# Altium PCB 6F.PcbDoc
Units mm, origin at the board's own origin, x right, y up, seen from the top; angles counter-clockwise.
Board outline 175 x 100 mm, 2 copper layers (Top Layer, Bottom Layer); 66 components, 52 nets, 216 pads, 0 vias.
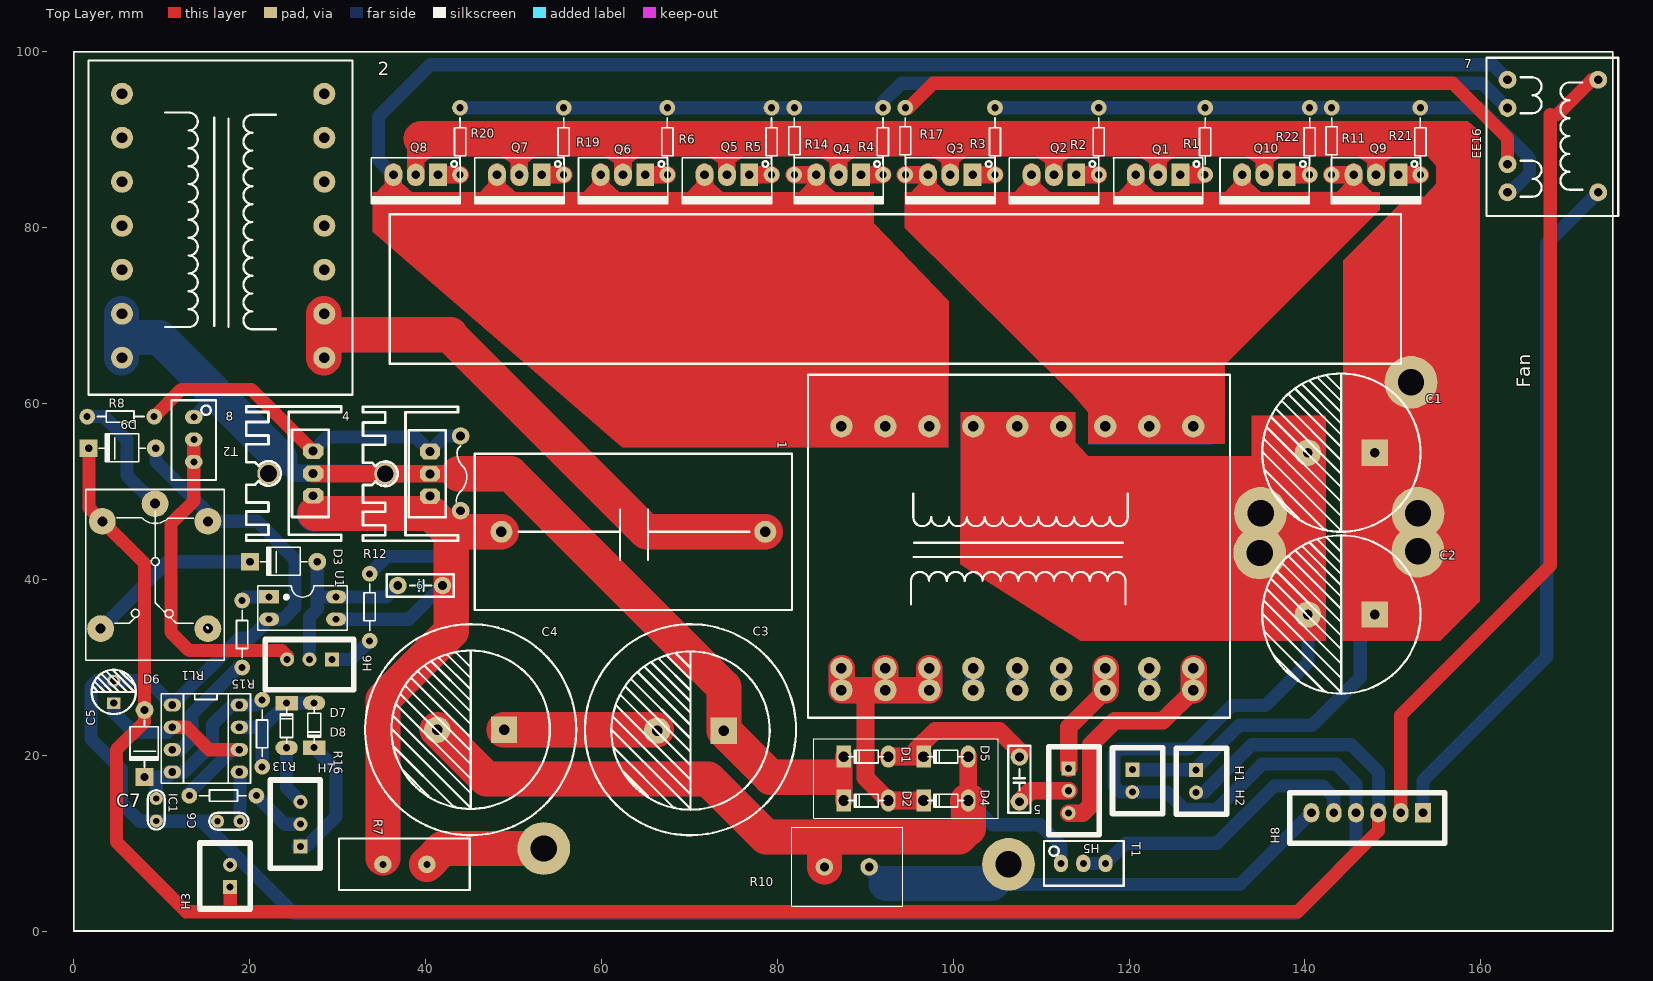
[diagram p0: Top Layer view]
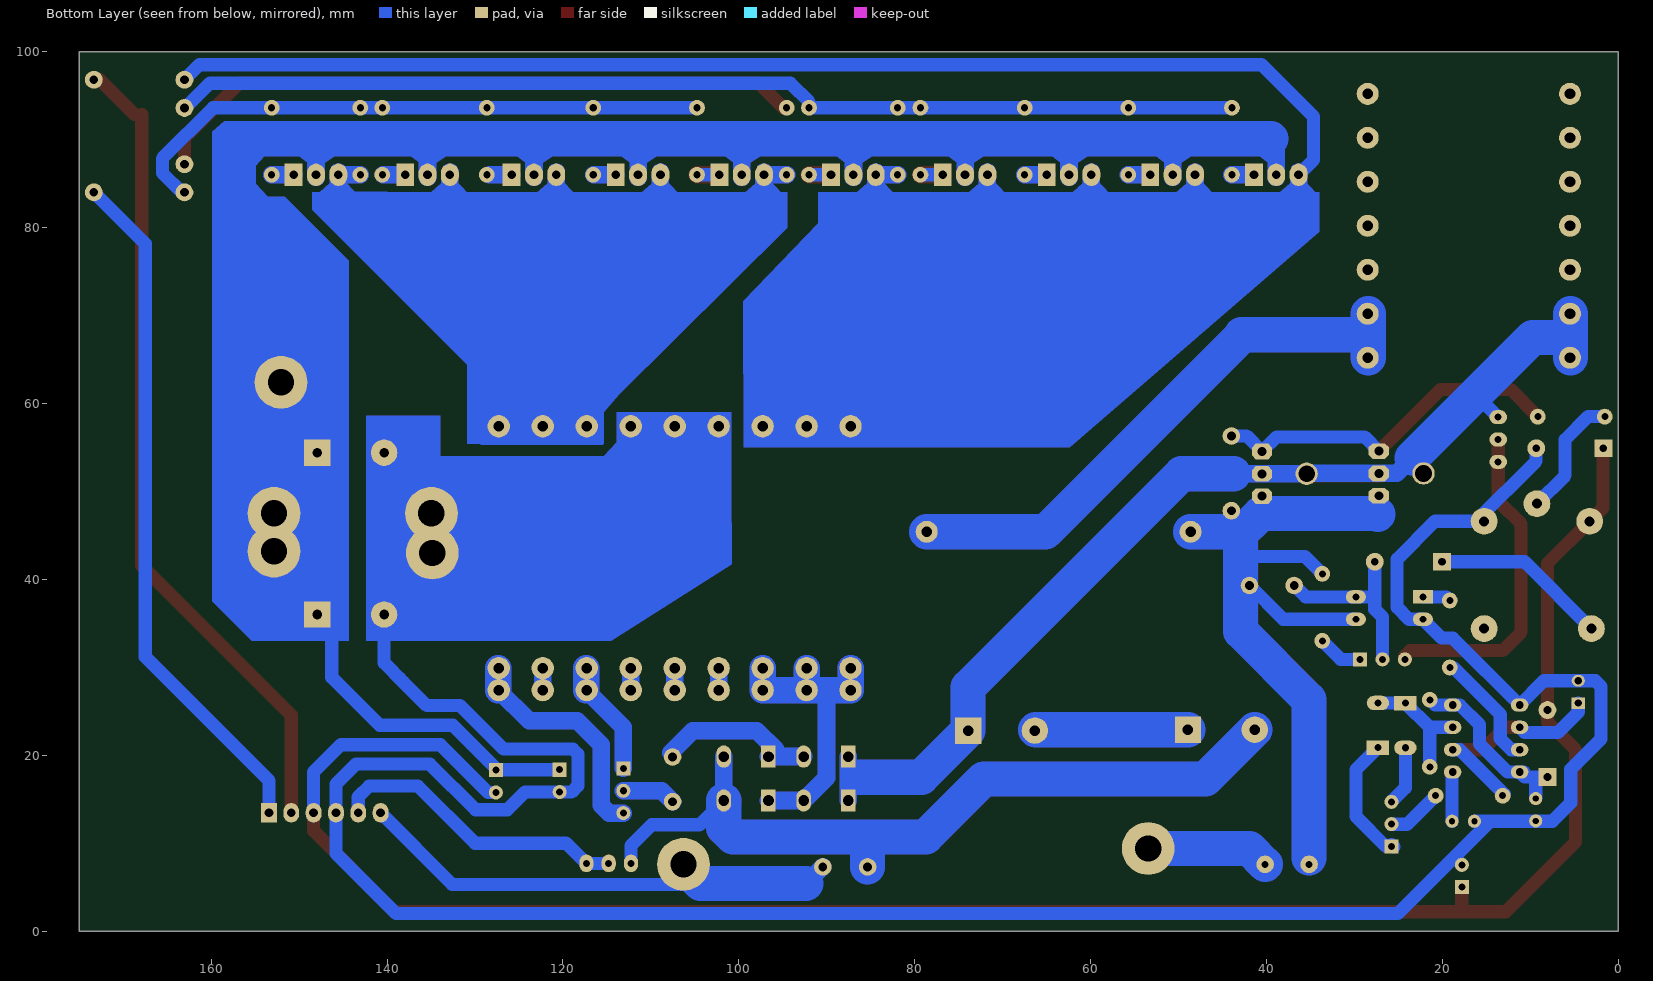
[diagram p1: Bottom Layer view, seen from below]
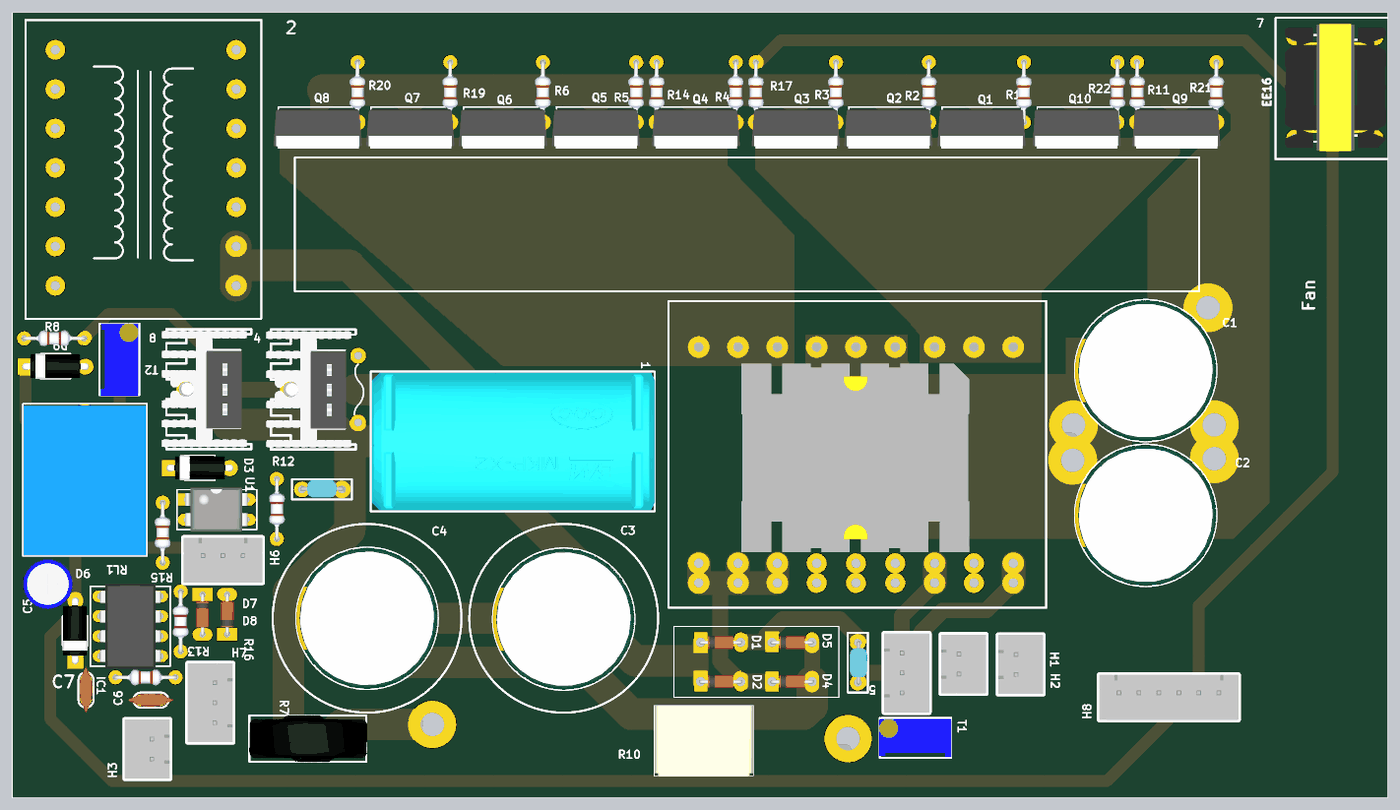
[diagram p2: 3D render of the assembled board from above, using the file's embedded part models]

## Layer stack, top to bottom
Top Layer: signal copper 0.0356
Dielectric: dielectric 0.32, FR-4, Dk 4.8
Bottom Layer: signal copper 0.0356

## Board outline
0,0 175,0 175,100 0,100 0,0

## Design rules (kind name [scope] priority, off if disabled: settings)
Clearance [All] p1: gap=0
ComponentClearance [All] p1: gap=0 collisioncheckmode=3 verticalgap=0.254 showdistances=FALSE
Height [All] p1: minheight=0 maxheight=50.8 prefheight=12.7
MatchedLengths E16 [All] p1: tolerance=0 checknetsindiffpair=TRUE checkdiffpairvsdiffpair=TRUE checkothers=TRUE
MinimumSolderMaskSliver [All] p1: minsoldermaskwidth=0.1
PolygonConnect [All] p1: connectstyle=Relief reliefconductorwidth=0.254 reliefentries=4 polygonreliefangle="90 Angle"
RoomDefinition 8F [InComponentClass('8F')] p1: confinementstyle=ConfineIn formatcopy=TRUE lockcomponents=FALSE outline -345.84,-25.64 -295.04,-25.64 -295.04,-0.24 -345.84,-0.24
RoutingVias [All] p1: holewidth=0.711 width=1.27 viastyle="Through Hole" minholewidth=0.711 minwidth=1.27 maxholewidth=0.711 maxwidth=1.27
SilkToSilkClearance [(IsText)] p1: silktosilkclearance=0
SilkscreenOverComponentPads [All] p1: minsilkscreentomaskgap=0
SolderMaskExpansion [All] p1: expansion=0.102
Width [All] p1: maxlimit=10 minlimit=0.254 preferedwidth=1
23 further rules are at their usual default settings.

## Classes and differential pairs
net class E16: E16_1 E16_2

## Components (designator, comment, footprint, x,y, rotation, side; value= is the part's Value field where it differs from the comment)
1 "Cap_5UF250V" Cap_5UF250V 78.64,45.4 r0 top
2 "L2" EE35 31.7,61 r90 top
4 "TYN_1225" QTO-220H3 40.52,49.46 r90 top
5 "Cap_684J250V" Cap_104J400V 107.54,19.8 r270 top
6 "Cap_104J400V" Cap_104J400V 36.86,39.3 r0 top
7 "EE16" EE16 163.04,84 r90 top
8 "TYN_1225" QTO-220H3 27.24,49.5 r90 top
C1 "4700uF" "tu hoa 18mm" 144.14,54.4 r0 top
C2 "4700uF" "tu hoa 18mm" 144.14,36 r0 top
C3 "100uF" "tu Hoa 18mm" 70.14,22.8 r0 top
C4 "100uF" "tu Hoa 18mm" 45.14,22.9 r0 top
C5 "1uF" "tu hoa 5mm" 4.56,27.2 r90 top
C6 "104" "tu gom" 17.64,12.5 r180 top
C7 "104" "tu gom" 9.4,13.8 r90 top
D1 "Diode" "DIODE 0.5A"#1 90.094,19.851 r0 top
D2 "Diode" "DIODE 0.5A"#1 90.094,14.851 r0 top
D3 "100v" "DIODE 1A" 28.96,42 r0 top
D4 "Diode" "DIODE 0.5A"#1 99.174,14.851 r0 top
D5 "Diode" "DIODE 0.5A"#1 99.174,19.851 r0 top
D6 "100v" "DIODE 1A" 8.06,26.4 r90 top
D7 "100v" "DIODE 0.5A"#2 27.34,23.4 r90 top
D8 "100v" "DIODE 0.5A"#2 24.219,23.387 r270 top
D9 "100v" "DIODE 1A" 10.6,54.9 r0 top
H1 "Fan" XH2.54M-2 120.38,18.351 r270 top
H2 "JackCoBop" XH2.54M-2 127.64,18.3 r270 top
H3 "CachLy" XH2.54M-2 17.8,5 r90 top
H5 "Switch" XH2.54M-3 113.14,18.5 r270 top
H6 "TanSo" XH2.54M-3 29.36,30.9 r180 top
H7 "TanSo" XH2.54M-3 25.8,9.62 r90 top
H8 "Header 6P 2.54 Duc Thang" XH2.54M-6 153.434,13.451 r180 top
IC1 "LM555 DIP" DIP8 15.04,21.9 r270 top
Q1 "IRF840" QTO-220 125.84,86 r180 top
Q2 "IRF840" QTO-220 114,86 r180 top
Q3 "IRF840" QTO-220 102.22,86 r180 top
Q4 "IRF840" QTO-220 89.52,86 r180 top
Q5 "IRF840" QTO-220 76.82,86 r180 top
Q6 "IRF840" QTO-220 65,86 r180 top
Q7 "IRF840" QTO-220 53.22,86 r180 top
Q8 "IRF840" QTO-220 41.44,86 r180 top
Q9 "IRF840" QTO-220 150.62,86 r180 top
Q10 "IRF840" QTO-220 137.94,86 r180 top
R1 "100" PCBComponent_1 128.66,93.62 r270 top
R2 "100" PCBComponent_1 116.56,93.62 r270 top
R3 "100" PCBComponent_1 104.76,93.62 r270 top
R4 "100" PCBComponent_1 92.02,93.62 r270 top
R5 "100" PCBComponent_1 79.36,93.62 r270 top
R6 "100" PCBComponent_1 67.5,93.62 r270 top
R7 "5D-9" "tro nhiet d-9" 37.66,7.6 r0 top
R8 "100" PCBComponent_1 9.16,58.5 r180 top
R10 "0.47R" Res_5W 77.56,3.7 r0 top
R11 "2k2" PCBComponent_1 143.04,86 r90 top
R12 "100K" PCBComponent_1 33.66,33 r90 top
R13 "18K/4148" PCBComponent_1 21.44,26.3 r270 top
R14 "2k2" PCBComponent_1 81.94,86 r90 top
R15 "2k2" PCBComponent_1 19.16,37.6 r270 top
R16 "18K/4148" PCBComponent_1 13.16,15.4 r0 top
R17 "0" PCBComponent_1 94.56,86 r90 top
R19 "100" PCBComponent_1 55.72,93.62 r270 top
R20 "100" PCBComponent_1 43.94,93.62 r270 top
R21 "100" PCBComponent_1 153.12,93.62 r270 top
R22 "100" PCBComponent_1 140.54,93.62 r270 top
RL1 "Relay" "Relay 5 Chan SRD" 9.26,48.6 r270 top
T1 "10K" "Bien Tro Vi Chinh Dung" 114.8,7.7 r0 top
T2 "500K" "Bien Tro Vi Chinh Dung" 13.66,55.9 r270 top
U1 "OPTO PC817 DIP4" DIP4 22.16,38 r270 top
? "EE4220" EE4220 87.3,57.4 r0 top

## Footprints (in the part's own frame and the unit in brackets; to place one, negate y for a bottom-side part, rotate by r counter-clockwise, add the part's x,y. Pads: shape width x height; smd on the part's side, far side on the other; paste and mask are expansions set on the pad)
"Bien Tro Vi Chinh Dung" [mm] "Bien tro vi chinh"
  oval 1.6x2 hole 0.8: 1(-2.54,0) 2(0,0) 3(2.54,0)
  silkscreen extent -4.47,-2.54 4.6,2.54, body extent -4.54,-2.4 4.66,2.4, height 12.02
Cap_5UF250V [mm] "C?"
  round 2.5 hole 1.2: 1(0,0) 2(-30,0)
  silkscreen extent -33.02,-8.89 3.05,8.89, body extent -32.89,-8.75 3.11,8.75, height 31.5
Cap_104J400V [mm] "C?"
  round 2 hole 1: 1(0,0) 2(5.08,0)
  silkscreen extent -1.27,-1.27 6.35,1.27, body extent -0.25,-1.02 5.33,1.19, height 6
"DIODE 0.5A"#1 [mm] "Diode muoi, xung"
  oval 1.651x2.54 hole 1.2: 1(2.54,0)
  rect 1.651x2.54 hole 1.2: 2(-2.54,0)
  silkscreen extent -2.03,-0.76 2.03,0.71, body extent -2.76,-0.84 2.76,0.81, height 1.56
"DIODE 0.5A"#2 [mm] "Diode muoi, xung"
  oval 1.651x2.54 hole 0.813: 1(2.54,0)
  rect 1.651x2.54 hole 0.813: 2(-2.54,0)
  silkscreen extent -2.03,-0.76 2.03,0.71, body extent -2.76,-0.84 2.76,0.81, height 1.56
"DIODE 1A" [mil] "Diode 1A"
  round 80 hole 35: 1(-50,0)
  rect 80x80 hole 35: 2(-350,0)
  silkscreen extent -305,-61 -95,65, body extent -366,-61 -34,65, height 122
DIP4 [mil] "W.300/L.400"
  rect 60x90 hole 31: 1(0,2.52)
  oval 60x90 hole 31: 2(100,2.52) 3(100,302.52) 4(0,302.52)
  silkscreen extent -50,-47 150,353, body extent -59,-7 159,307, height 170
DIP8 [mm] "W.300/L.400"
  oval 1.5x2 hole 0.864: 1(-3.81,-3.81) 2(-1.27,-3.81) 3(1.27,-3.81) 4(3.81,-3.81) 5(3.81,3.81) 6(1.27,3.81) 7(-1.27,3.81) 8(-3.81,3.81)
  silkscreen extent -5.08,-5.08 5.08,5.08, body extent -5.4,-3.88 5.4,3.88, height 4.5
EE16 [mil] "L?"
  round 80 hole 39: 1(0,-405.51) 2(503.94,-405.51) G1(0,0) G2(377.95,0) S1(125.98,0) S2(503.94,0)
  silkscreen extent -106,-496 602,94, body extent -67,-461 571,48, height 652
EE35 [mm] "L?"
  round 2.5 hole 1.2: 1(4.2,26.2) 1(9.2,26.2) 3(14.2,26.2) 4(19.2,26.2) 5(24.2,26.2) 6(29.2,26.2) 7(34.2,26.2) 8(4.2,3.2) 8(9.2,3.2) 10(14.2,3.2) 11(19.2,3.2) 12(24.2,3.2) 13(29.2,3.2) 14(34.2,3.2)
  silkscreen extent 0,0 38,30
EE4220 [mm]
  round 2.54 hole 1.2: 0v(0,-27.5) 0v(0,-30) 0v(5,-27.5) 0v(5,-30) 0v(10,-27.5) 0v(10,-30) D1(0,0) D1(5,0) D1(10,0) D2(30,0) D2(35,0) D2(40,0) GND(15,0) GND(20,0) GND(25,0) NC2(15,-27.5) NC2(15,-30) NC3(20,-27.5) NC3(20,-30) NC4(25,-27.5) NC4(25,-30) NC5(35,-27.5) NC5(35,-30) Out1(30,-27.5) Out1(30,-30) Out2(40,-27.5) Out2(40,-30)
  Bottom Layer lines w2: 0,-27.5 0,-30 ; 5,-30 5,-27.5 ; 10,-30 10,-27.5 ; 15,-30 15,-27.5 ; 20,-30 20,-27.5 ; 25,-30 25,-27.5 ; 30,-30 30,-27.5 ; 35,-30 35,-27.5 ; 40,-30 40,-27.5 ; 0,-30 0,-30
  silkscreen extent -3.81,-33.15 44.19,5.85, body extent 5.42,-26.09 34.42,-2.09, height 21.4
PCBComponent_1 [mm]
  round 1.8 hole 0.8: 0(0,0) 1(7.62,0)
  silkscreen extent 1.14,-0.63 6.48,0.64, body extent -0.24,-1.02 7.86,0.98, height 2
QTO-220 [mil] "TO-220 - 1-2-3"
  rect 80x100 hole 39: 1(0,0)
  oval 80x100 hole 39: 2(100,0) 3(200,0)
  silkscreen extent -100,-76 300,130, body extent -119,-64 322,121, height 755
QTO-220H3 [mil] "TO-220 1-2-3"
  oct 70x90 hole 40: 1(0,0) 2(100,0) 3(200,0)
  round 100 hole 75: 2(100,200)
  silkscreen extent -200,-125 400,300, body extent -190,-102 392,323, height 984
"Relay 5 Chan SRD" [mil] "Relay SPDT, 5 pin, 10A,W 650mil, L 800mil, H 800mil"
  round 120 hole 45: 1(0,0) 2(559.06,236.22) 3(559.06,-243.78) 4(78.74,-236.22) 5(78.74,236.22)
  silkscreen extent -63,-311 700,310, body extent -55,-306 697,304, height 602
Res_5W [mm] "R?"
  round 2 hole 1: 1(7.8,3.6) 2(12.9,3.6)
  silkscreen extent 4.1,-0.9 16.7,8.1, body extent 4.15,-0.9 16.65,8.1, height 25
"tro nhiet d-9" [mm]
  round 2 hole 0.8: 1(-2.5,0) 2(2.5,0)
  silkscreen extent -7.49,-2.92 7.37,2.92, body extent -7.5,-3 7.5,3, height 23.5
"tu gom" [mm] "Tu gom mini"
  round 1.5 hole 0.7: 1(-1.27,0) 2(1.27,0)
  silkscreen extent -2.25,-0.97 2.22,0.97, body extent -2.92,-0.85 2.92,0.85, height 6.12
"tu hoa 5mm" [mm]
  rect 1.3x1.5 hole 0.8: 1(-1.27,0)
  oval 1.3x1.5 hole 0.8: 2(1.27,0)
  silkscreen extent -2.51,-2.51 2.51,2.51, body extent -3.12,-3.18 3.23,3.18, height 14.55
"tu hoa 18mm" [mm]
  rect 3x3 hole 1.1: 1(3.8,0)
  round 3 hole 1.1: 2(-3.8,0)
  silkscreen extent -9,-9 9,9, body extent -9.01,-9 9,9, height 3
"tu Hoa 18mm" [mm]
  rect 3x3 hole 1.2: 1(3.8,0)
  round 3 hole 1.2: 2(-3.8,0)
  silkscreen extent -9,-9 9,9, body extent -9.01,-9 9,9, height 3
XH2.54M-2 [mm]
  rect 1.6x1.6 hole 0.8: 1(0,0)
  round 1.6 hole 0.8: 2(2.54,0)
  silkscreen extent -2.48,-2.26 5.02,3.46, body extent -2.48,-2.26 5.02,3.48, height 6.91
XH2.54M-3 [mm]
  rect 1.6x1.6 hole 0.8: 1(0,0)
  round 1.6 hole 0.8: 2(2.54,0) 3(5.08,0)
  silkscreen extent -2.48,-2.26 7.56,3.46, body extent -2.48,-2.26 7.56,3.48, height 6.91
XH2.54M-6 [mm]
  rect 1.8x2.2 hole 1 unplated: 1(0,0)
  oval 1.8x2.2 hole 1 unplated: 2(2.54,0) 3(5.08,0) 4(7.62,0) 5(10.16,0) 6(12.7,0)
  silkscreen extent -2.48,-2.26 15.18,3.46, body extent -2.48,-2.26 15.18,3.48, height 6.91

## Part data
1 5 6: "C?"
2: library part EE35
7: "L?"
C1 C2: library part "Tu Hoa 4700uF 35V 18x30", "C?m"
C3 C4: library part "Tu Hoa 100uF 450V 18x35", "C?m"
C5: library part "Tu Hoa 1uF 50V 5x11", "C?m"
C6 C7: library part "Tu gom 104 50V", "C?m"
D1 D2 D4 D5: "Default Diode"
D3 D6 D9: library part "Diode 1N4007", "C?m"
D7 D8: library part "Diode 1N4148", "C?m"
H1 H2 H3: library part "Header 2P 2.54 Duc Thang", "C?m"
H5 H6 H7: library part "Header 3P 2.54 Duc Thang", "C?m"
H8: "C?m"
IC1: "Dán"
Q1 Q2 Q3 Q4 Q5 Q6 Q7 Q8 Q9 Q10: "MOSFET N - CHANNEL 500V - 0.75 - 8A - TO-220"
R1 R2 R3 R4 R5 R6 R8 R11 R12 R13 R14 R15 R16 R17 R19 R20 R21 R22: library part Res_7.62, "R?"
R7: library part "Tro Nhiet NTC 5D-9", "C?m"
R10: library part Res_5W
RL1: library part "Relay 5 Chan SRD", "Relay 5 Chan"
T1 T2: library part "Bien Tro Tinh Chinh 10K Dung", "C?m"
U1: "Single Opto"

## Free pads (board coordinates)
  round 2 hole 1: 0(44,56.3) 1(44,47.8)
  round 6 hole 3: 3(53.46,9.4) 3(106.3,7.6) 3(134.86,43) 3(134.96,47.5) 3(152.06,62.4) 3(152.86,43.2) 3(152.86,47.5)

## Nets (pads, with @x,y where several pads share a name; then routed paths per layer and width w, separated by ;. In a path a pad name is that pad's centre, name@x,y a point inside that pad or via, vN(x,y) a via of type N, cw(c..) or ccw(c..) an arc to the next point about the centre after c; other vN are vias at no path point)
12V: C1.1 C2.1 H1.1 H2.1 pad.3@152.06,62.4 pad.3@152.86,43.2 pad.3@152.86,47.5 Q1.2 Q2.2 Q3.2 Q4.2 Q5.2 Q6.2 Q7.2 Q8.2 Q9.2 Q10.2 | length 326
  Top Layer w2: Q8.2 38.9,89.458 ; Q7.2 50.68,88.958 ; Q6.2 62.46,88.958 ; Q5.2 74.28,88.958 ; Q4.2 86.98,88.958 ; Q3.2 99.68,88.958 ; Q2.2 111.46,88.958 ; Q1.2 123.3,88.958 ; Q10.2 135.4,88.958 ; Q9.2 148.08,88.958
  Top Layer w4: 39.522,90.1 153.34,90.1
  Bottom Layer w1.5: H1.1 H2.1@127.64,18.351 ; H2.1 H2.1@127.64,18.351 ; C2.1 146.287,34.347 146.287,28.852 140.834,23.4 132.54,23.4 127.64,18.5 H2.1@127.64,18.351
  Bottom Layer w2: Q8.2 38.9,89.458 ; Q7.2 50.68,88.958 ; Q6.2 62.46,88.958 ; Q5.2 74.28,88.958 ; Q4.2 86.98,88.958 ; Q3.2 99.68,88.958 ; Q2.2 111.46,88.958 ; Q1.2 123.3,88.958 ; Q10.2 135.4,88.958 ; Q9.2 148.08,88.958
  Bottom Layer w4: 39.522,90.1 153.34,90.1
-300V: C4.2 D4.1 D5.1 R10.1 T1.1 | length 170.6
  Top Layer w2: D4.1 D5.1
  Top Layer w4: C4.2 46.94,17.3 72.14,17.3 78.74,10.7 100.64,10.7 101.64,11.7 ; R10.1 85.36,10.48 ; D4.1@101.64,14.777 D4.1 ; 101.74,11.7 D4.1@101.74,14.777
  Bottom Layer w1.5: D4.1 104.465,12.1 109.9,12.1 112.26,9.74 T1.1
  Bottom Layer w2: 101.714,13.454 D4.1 D5.1
  Bottom Layer w4: C4.2 46.94,17.3 72.16,17.3 78.76,10.7 85.06,10.7 ; R10.1 85.36,10.4 ; D4.1 101.714,11.754 100.66,10.7 85.26,10.7 ; 85.06,10.7 85.16,10.6 85.26,10.7 ; 85.06,10.7 85.26,10.7
COBOP2: D6.1 D9.2 H2.2 H3.1 H8.3 RL1.4 | length 234.8
  Top Layer w1.5: D9.2@1.73,55.1 1.73,48.13 RL1.4 8.06,41.8 D6.1 8.06,23.8 4.86,20.6 4.86,10.14 12.8,2.2 17.7,2.2 ; 17.8,3.84 H3.1 17.8,2.3 17.7,2.2 ; H8.3 148.354,11.394 139.16,2.2 17.7,2.2
  Bottom Layer w1.5: H2.2 128.5,15.76 133.94,21.2 145.1,21.2 145.254,21.2 148.354,18.1 H8.3 H8.3@148.354,13.114
DB3: R8.1 RL1.1 | length 14.2
  Bottom Layer w1.5: R8.1 3.46,58.5 6.06,55.9 6.06,51.8 RL1.1
E16_1: 7.1 H8.1 | length 78.8
  Bottom Layer w1.5: H8.1 153.434,17.134 167.5,31.2 167.5,78.16 7.1
E16_2: 7.2 H8.2 | length 94.5
  Top Layer w1.5: H8.2 150.894,24.554 167.9,41.56 167.9,92.84 ; 168.7,92.84 170.512,94.652 ; 171.76,95.9 170.512,94.652 ; 7.2 172.66,96.8 170.512,94.652
G1: 7.G1 R1.0 R2.0 R3.0 R11.1 R21.0 R22.0 | length 73.5
  Bottom Layer w1.5: R3.0 R2.0 144.1,93.62 ; 138.86,93.62 R11.1 R21.0 159.78,93.62 165.54,87.86 165.54,86.2 163.34,84 7.G1
G2: 7.G2 R4.0 R5.0 R6.0 R14.1 R19.0 R20.0 | length 122.7
  Top Layer w0: R6.0@66.62,93.62 R6.0
  Bottom Layer w1.5: R20.0 R19.0 R6.0 R5.0 R14.1 R4.0 92.02,94.28 94.14,96.4 160.14,96.4 162.94,93.6 7.G2
GND: ?.GND C1.2 C2.2 C5.2 C6.2 C7.1 D9.1 H1.2 H3.2 H8.4 IC1.1 pad.3@134.86,43 pad.3@134.96,47.5 RL1.5 U1.2 | length 303.9
  Bottom Layer w1.5: D9.1@9.35,55.1 9.35,53.45 16.2,46.6 20.86,46.6 25.16,42.3 25.16,36.8 23.82,35.46 U1.2 20.084,33.32 18.84,33.32 IC1.1 8.47,28.47 C5.2 2.63,28.47 1.96,27.8 1.96,21.86 5.414,18.406 5.414,14.586 7.5,12.5 14.56,12.5 ; C6.2 14.56,12.5 ; H3.2 18.63,8.37 ; 138.687,28.852 138.147,28.313 ; C2.2 140.34,30.506 138.147,28.313 ; 14.56,12.5 25.06,2 138.96,2 145.814,8.854 H8.4 145.814,16.726 143.54,19 135.14,19 129.94,13.8 126.34,13.8 124.329,15.811 H1.2 119.029,15.811 118.3,16.54 118.3,20.14 118.86,20.7 126.76,20.7 131.7,25.64 135.474,25.64 138.147,28.313
  Bottom Layer w4: pad.3@133.44,42.7 138.687,42.7
NC2: ?.NC2
NC3: ?.NC3
NC4: ?.NC4
NC5: ?.NC5
Net1_1: 1.1 2.8 | length 129
  Top Layer w4: 2.8@28.44,65.2 28.44,67.8 ; 2.8@28.44,70.2 28.44,67.8 ; 42.76,67.8 65.16,45.4 ; 42.86,67.8 28.44,67.8 ; 65.26,45.4 1.1
  Bottom Layer w4: 2.8@28.44,65.2 28.44,67.8 ; 2.8@28.44,70.2 28.44,67.8 ; 42.76,67.8 65.16,45.4 ; 42.86,67.8 28.44,67.8 ; 65.26,45.4 1.1
Net4_3: 4.3 8.3 pad.0 R8.0 | length 41.1
  Top Layer w1.5: R8.0 12.26,61.6 20.22,61.6 8.3
  Bottom Layer w1.5: 8.3 28.86,56.2 38.86,56.2 4.3 42.28,56.3 pad.0
Net5_1: 5.1 D1.1 D5.2 | length 35.7
  Top Layer w2: D1.1 D5.2 ; D5.2@95.837,20.648 97.989,22.8 105.24,22.8 5.1@107.74,20.3
  Bottom Layer w2: D1.1 D5.2 ; D5.2@95.837,20.648 97.989,22.8 105.24,22.8 5.1@107.74,20.3
Net5_2: 5.2 H5.2 | length 12.2
  Top Layer w2: 5.2 108.8,15.98 113.12,15.98 H5.2
  Bottom Layer w2: 5.2 108.78,15.96 H5.2
Net7_S1: 7.S1 R17.1 | length 75.2
  Top Layer w1.5: R17.1 94.96,93.62 97.74,96.4 156.8,96.4 163.04,90.16 7.S1
Net_0v: ?.0v D2.1 D4.2 | length 70.2
  Top Layer w2: 90.04,27.4 90.04,17.445 D2.1 D4.2
  Top Layer w3: ?.0v@87.34,29.9 87.34,27.4 90.04,27.4 ?.0v@92.3,27.4 ; ?.0v@92.3,29.9 ?.0v@92.3,27.4 ; ?.0v@97.3,29.9 97.3,27.4 ?.0v@92.3,27.4
  Bottom Layer w2: 90.04,27.4 90.04,17.445 D2.1 D4.2
  Bottom Layer w3: ?.0v@87.3,29.9 87.3,27.4 ?.0v@92.3,27.4 ; ?.0v@92.3,29.9 ?.0v@92.3,27.4 ; ?.0v@97.3,29.9 97.3,27.4 ?.0v@92.3,27.4
Net_Out1: ?.Out1 H5.1 | length 26.3
  Top Layer w2: H5.1 113.14,23.2 ?.Out1@117.34,27.4
  Top Layer w3: ?.Out1@117.34,27.4 ?.Out1@117.34,29.9
  Bottom Layer w2: H5.1 113.14,23.2 ?.Out1@117.34,27.4
  Bottom Layer w3: ?.Out1@117.34,27.4 ?.Out1@117.34,29.9
Net_Out2: ?.Out2 H5.3 | length 53
  Top Layer w2: H5.3 114.76,13.42 115.64,14.3 115.64,21.18 118.36,23.9 123.84,23.9 ?.Out2@127.34,27.4
  Top Layer w3: ?.Out2@127.34,27.4 ?.Out2@127.34,29.9
  Bottom Layer w2: H5.3 114.76,13.42 115.64,14.3 115.64,21.18 118.36,23.9 123.84,23.9 ?.Out2@127.34,27.4
  Bottom Layer w3: ?.Out2@127.34,27.4 ?.Out2@127.34,29.9
NetC3_2: C3.2 C4.1 | length 34.6
  Top Layer w4: C4.1 C3.2@66.24,22.9
  Bottom Layer w4: C4.1 C3.2@66.24,22.9
NetC5_1: C5.1 IC1.2 IC1.6 R16.0 | length 25.8
  Top Layer w1.5: IC1.2 12.89,23.17 15.43,20.63 IC1.6
  Bottom Layer w1.5: C5.1 4.56,24.9 6.86,22.6 10.66,22.6 IC1.2 ; R16.0 12.98,15.58 18.03,20.63 IC1.6 IC1.6@18.82,20.6
NetC6_1: C6.1 IC1.5 | length 5.6
  Bottom Layer w1.5: IC1.5@18.85,18.03 IC1.5 ; C6.1 IC1.5@18.91,18.03
NetC7_2: C7.2 D6.2 IC1.4 IC1.8 R13.0 | length 21.2
  Bottom Layer w1.5: D6.2 9.3,17.51 ; C7.2@9.4,15.17 9.4,17.41 9.3,17.51 ; IC1.4@10.76,18.09 IC1.4 ; R13.0 20.85,25.71 IC1.8 18.01,25.71 15.8,23.5 15.8,21.3 12.59,18.09 IC1.4 ; 9.3,17.51 10.65,17.51 IC1.4
NetD3_2: D3.2 RL1.3 | length 20.2
  Bottom Layer w1.5: RL1.3 10.668,42 D3.2
NetD7_1: D7.1 D8.2 IC1.7 R13.1 | length 14.1
  Bottom Layer w1.5: IC1.7 21.462,23.17 ; R13.1 21.44,23.148 ; 21.44,23.17 21.462,23.17 ; D7.1 24.232,25.94 D8.2 21.462,23.17
NetD7_2: D7.2 H7.1 | length 14.7
  Bottom Layer w1.5: H7.1@25.54,9.6 H7.1@25.8,9.86 ; H7.1 26.42,9.62 29.84,13.04 29.84,18.36 D7.2
NetD8_1: D8.1 H7.3 | length 6.8
  Bottom Layer w1.5: D8.1 24.219,16.281 H7.3
NetH6_1: H6.1 R12.0 | length 5.6
  Bottom Layer w1.5: H6.1@29.76,30.9 H6.1 31.56,30.9 R12.0
NetH6_3: H6.3 T2.2 T2.3 | length 37.7
  Top Layer w1.5: T2.2 T2.3 13.66,48.9 11.06,46.3 11.06,34 13.16,31.9 23.66,31.9 24.28,31.28 H6.3
NetH7_2: H7.2 R16.1 | length 6.4
  Bottom Layer w1.5: R16.1 24.02,12.16 ; 24.04,12.14 24.02,12.16 ; H7.2 24.02,12.16
NetIC1_3: IC1.3 R15.1 | length 13.4
  Bottom Layer w1.5: IC1.3 12.17,20.63 13.44,21.9 13.44,24.64 18.78,29.98 R15.1
NetQ1_1: Q1.1 R1.1 | length 5
  Top Layer w2: Q1.1 R1.1@128.34,86
  Bottom Layer w2: Q1.1 R1.1@128.34,86
NetQ2_1: Q2.1 R2.1 | length 5
  Top Layer w2: Q2.1 R2.1@116.5,86
  Bottom Layer w2: Q2.1 R2.1@116.5,86
NetQ3_1: Q3.1 R3.1 | length 5
  Top Layer w2: Q3.1 R3.1@104.72,86
  Bottom Layer w1.5: Q3.1 R3.1
NetQ4_1: Q4.1 R4.1 | length 5
  Top Layer w2: Q4.1 R4.1
  Bottom Layer w1.5: Q4.1 R4.1
NetQ5_1: Q5.1 R5.1 | length 5
  Top Layer w2: Q5.1 R5.1@79.32,86
  Bottom Layer w1.5: Q5.1 R5.1
NetQ6_1: Q6.1 R6.1 | length 5
  Top Layer w2: Q6.1 R6.1
  Bottom Layer w2: Q6.1 R6.1
NetQ7_1: Q7.1 R19.1 | length 5
  Top Layer w2: Q7.1 R19.1
  Bottom Layer w2: Q7.1 R19.1
NetQ8_1: Q8.1 R20.1 | length 5
  Top Layer w2: Q8.1 R20.1
  Bottom Layer w2: Q8.1 R20.1
NetQ9_1: Q9.1 R21.1 | length 5
  Top Layer w2: Q9.1 R21.1
  Bottom Layer w2: Q9.1 R21.1
NetQ10_1: Q10.1 R22.1 | length 5
  Top Layer w2: Q10.1 R22.1@140.44,86
  Bottom Layer w2: Q10.1 R22.1@140.44,86
NetR15_0: R15.0 U1.1 | length 3.2
  Bottom Layer w1.5: R15.0 19.56,38 U1.1
OUT+: pad.3@53.46,9.4 R7.2 | length 28.1
  Top Layer w4: R7.2 41.96,9.4 pad.3@53.46,9.4
  Bottom Layer w4: R7.2 41.96,9.4 ; 42.04,9.4 pad.3@53.54,9.4
PC817_1: H8.6 pad.3@106.3,7.6 R10.2 | length 57.8
  Bottom Layer w1.5: pad.3@105.392,6.432 106.524,5.3 132.583,5.3 H8.6
  Bottom Layer w2: R10.2 92.36,5.4
  Bottom Layer w4: 92.36,5.4 104.36,5.4 105.392,6.432 106.76,7.8 pad.3@106.3,7.6
PC817_2: H8.5 T1.2 T1.3 | length 34.4
  Bottom Layer w1.5: T1.2 T1.3 119.64,10 130,10 136.5,16.5 142.04,16.5 143.274,15.266 H8.5
RL2: 6.1 D3.1 H6.2 U1.4 | length 20.9
  Bottom Layer w1.5: H6.2 26.82,35.72 27.69,36.59 D3.1@27.69,41.7 ; 27.69,38 U1.4 35.56,38 6.1
S1: ?.D2 Q1.3 Q2.3 Q3.3 Q9.3 Q10.3 R11.0 R17.0 | length 52.4
  Top Layer w2: R17.0 Q3.3 97.14,82.88 ; 108.92,82.16 Q2.3 ; 120.76,82.1 Q1.3 ; 132.86,82.2 Q10.3 ; R11.0 Q9.3 145.54,82.18
  Bottom Layer w1.5: Q3.3@97.06,86.08 Q3.3
  Bottom Layer w2: R17.0 Q3.3 97.14,82.88 ; 108.92,82.16 Q2.3 ; 120.76,82.1 Q1.3 ; 132.86,82.2 Q10.3 ; R11.0 Q9.3 145.54,82.18
  Bottom Layer w4: 140.26,82.1 145.46,82.1
S2: 7.S2 ?.D1 Q4.3 Q5.3 Q6.3 Q7.3 Q8.3 R14.0 | length 181.8
  Top Layer w2: 36.36,82.4 Q8.3 ; 47.82,82.16 47.82,82.48 ; 48.14,82.48 Q7.3 ; 59.66,82.1 59.66,82.36 ; 59.92,82.36 Q6.3 ; 71.74,82.22 Q5.3 ; 71.76,82.2 71.76,82.22 ; R14.0 Q4.3 84.44,82.18
  Bottom Layer w1.5: Q8.3 34.66,87.7 34.66,92.6 40.56,98.5 161.34,98.5 7.S2
  Bottom Layer w2: 36.36,82.4 Q8.3 ; 47.82,82.16 47.82,82.48 ; 48.14,82.48 Q7.3 ; 59.66,82.1 59.66,82.36 ; 59.92,82.36 Q6.3 ; 71.74,82.22 Q5.3 ; 71.76,82.2 71.76,82.22 ; R14.0 Q4.3 84.44,82.18
SCR_A: 2.1 4.2 8.2 C3.1 D1.2 D2.2 T2.1 | length 199.1
  Top Layer w2: 8.2@27.24,52 35.44,52 40.52,52 43.76,52 ; D2.2 D1.2
  Top Layer w4: 43.76,52 49.66,52 73.94,27.72 C3.1 79.24,17.5 86.26,17.5
  Bottom Layer w1.5: T2.1 16.12,60.9
  Bottom Layer w2: 23.448,53.812 25.22,52.04 27.24,52.04 4.2@35.44,52.04 ; 4.2@35.46,52 4.2@40.54,52 ; 4.2@40.52,52 43.76,52 ; 87.454,17.5 87.554,17.6 D1.2 ; D2.2 87.554,17.5
  Bottom Layer w4: 2.1@5.44,65.2 5.44,67.5 ; 2.1@5.44,70.2 5.44,67.5 ; 23.448,53.812 9.76,67.5 5.44,67.5 ; 43.76,52 49.66,52 73.94,27.72 C3.1 79.24,17.5 86.26,17.5
SCR_K: 1.2 4.1 6.2 8.1 pad.1 R7.1 R12.1 U1.3 | length 150.5
  Top Layer w2: 44,46.66 pad.1
  Top Layer w4: 27.46,47.5 40.66,47.5 42.75,45.41 ; R7.1@35.16,8.3 35.16,26.32 42.94,34.1 42.94,45.22 42.75,45.41 ; 1.2@48.63,45.41 42.75,45.41
  Bottom Layer w1.5: 31.22,35.46 U1.3 38.1,35.46 6.2 ; R12.1 35.64,42.6 42.96,42.6
  Bottom Layer w4: 27.36,47.4 27.46,47.5 40.66,47.5 43.36,44.8 ; R7.1@35.16,8.3 35.16,26.3 42.96,34.1 42.96,45 ; 43.96,45.4 1.2
pads on no net: 2.3 2.4 2.5 2.6 2.7 2.10 2.11 2.12 2.13 2.14 RL1.2

## Other copper
Top Layer:
  region net 12V: 154.94,85 153.56,83.5 151.66,83.5 144.36,76.2 144.36,33 155.36,33 159.86,37.5 159.9,90.9 158.5,92.1 152.94,92.1 152.64,88.1 153.94,88.1 154.94,87
  region net S2: 34,84 34,79.5 62.36,55 99.46,55 99.5,71.6 91,80.5 91,84
  region net S1: 94.5,84 94.5,80 113.66,61 115.36,59 115.36,55.4 130.86,55.4 130.9,64.4 148.5,82 148.5,84
  region net 12V: 149.026,85.357 148.994,87.343 150.426,88.457 145.426,88.457 147.094,87.343 147.094,85.543 147.326,85.057 147.526,84.857 147.826,84.757 148.326,84.757 148.626,84.857 148.926,85.157
  region net 12V: 136.346,85.357 136.314,87.343 137.746,88.457 132.746,88.457 134.414,87.343 134.414,85.543 134.646,85.057 134.846,84.857 135.146,84.757 135.646,84.757 135.946,84.857 136.246,85.157
  region net 12V: 124.246,85.357 124.214,87.343 125.646,88.457 120.646,88.457 122.314,87.343 122.314,85.543 122.546,85.057 122.746,84.857 123.046,84.757 123.546,84.757 123.846,84.857 124.146,85.157
  region net 12V: 112.406,85.357 112.374,87.343 113.806,88.457 108.806,88.457 110.474,87.343 110.474,85.543 110.706,85.057 110.906,84.857 111.206,84.757 111.706,84.757 112.006,84.857 112.306,85.157
  region net 12V: 100.626,85.357 100.594,87.343 102.026,88.457 97.026,88.457 98.694,87.343 98.694,85.543 98.926,85.057 99.126,84.857 99.426,84.757 99.926,84.757 100.226,84.857 100.526,85.157
  region net 12V: 87.926,85.357 87.894,87.343 89.326,88.457 84.326,88.457 85.994,87.343 85.994,85.543 86.226,85.057 86.426,84.857 86.726,84.757 87.226,84.757 87.526,84.857 87.826,85.157
  region net 12V: 75.226,85.357 75.194,87.343 76.626,88.457 71.626,88.457 73.294,87.343 73.294,85.543 73.526,85.057 73.726,84.857 74.026,84.757 74.526,84.757 74.826,84.857 75.126,85.157
  region net 12V: 63.406,85.357 63.374,87.343 64.806,88.457 59.806,88.457 61.474,87.343 61.474,85.543 61.706,85.057 61.906,84.857 62.206,84.757 62.706,84.757 63.006,84.857 63.306,85.157
  region net 12V: 51.626,85.357 51.594,87.343 53.026,88.457 48.026,88.457 49.694,87.343 49.694,85.543 49.926,85.057 50.126,84.857 50.426,84.757 50.926,84.757 51.226,84.857 51.526,85.157
  region net 12V: 39.846,85.357 39.814,87.343 41.246,88.457 37.914,89.043 37.914,85.543 38.146,85.057 38.346,84.857 38.646,84.757 39.146,84.757 39.446,84.857 39.746,85.157
  region net S1: 144.594,86.643 144.594,85.043 143.194,83.543 148.194,83.543 146.494,85.043 146.294,86.943 146.094,87.143 145.794,87.243 145.294,87.243 144.994,87.143 144.694,86.843
  region net S1: 131.914,86.643 131.914,85.043 130.514,83.543 135.514,83.543 133.814,85.043 133.614,86.943 133.414,87.143 133.114,87.243 132.614,87.243 132.314,87.143 132.014,86.843
  region net S1: 119.814,86.643 119.814,85.043 118.414,83.543 123.414,83.543 121.714,85.043 121.514,86.943 121.314,87.143 121.014,87.243 120.514,87.243 120.214,87.143 119.914,86.843
  region net S1: 107.974,86.643 107.974,85.043 106.574,83.543 111.574,83.543 109.874,85.043 109.674,86.943 109.474,87.143 109.174,87.243 108.674,87.243 108.374,87.143 108.074,86.843
  region net S1: 96.194,86.643 96.194,85.043 94.794,83.543 99.794,83.543 98.094,85.043 97.894,86.943 97.694,87.143 97.394,87.243 96.894,87.243 96.594,87.143 96.294,86.843
  region net S2: 83.494,86.643 83.494,85.043 82.094,83.543 87.094,83.543 85.394,85.043 85.194,86.943 84.994,87.143 84.694,87.243 84.194,87.243 83.894,87.143 83.594,86.843
  region net S2: 70.794,86.643 70.794,85.043 69.394,83.543 74.394,83.543 72.694,85.043 72.494,86.943 72.294,87.143 71.994,87.243 71.494,87.243 71.194,87.143 70.894,86.843
  region net S2: 58.974,86.643 58.974,85.043 57.574,83.543 62.574,83.543 60.874,85.043 60.674,86.943 60.474,87.143 60.174,87.243 59.674,87.243 59.374,87.143 59.074,86.843
  region net S2: 47.194,86.643 47.194,85.043 45.794,83.543 50.794,83.543 49.094,85.043 48.894,86.943 48.694,87.143 48.394,87.243 47.894,87.243 47.594,87.143 47.294,86.843
  region net S2: 35.414,86.643 35.414,85.043 34.014,83.543 39.014,83.543 37.314,85.043 37.114,86.943 36.914,87.143 36.614,87.243 36.114,87.243 35.814,87.143 35.514,86.843
  region net GND: 142.36,58.6 133.96,58.6 133.96,54 115.36,54 113.86,55.6 113.86,59 100.86,59 100.86,51.2 100.8,41.7 114.5,33 142.36,33
Bottom Layer:
  region net 12V: 154.94,85 153.56,83.5 151.66,83.5 144.36,76.2 144.36,33 155.36,33 159.86,37.5 159.9,90.9 158.5,92.1 152.94,92.1 152.64,88.1 153.94,88.1 154.94,87
  region net S2: 34,84 34,79.5 62.36,55 99.46,55 99.5,71.6 91,80.5 91,84
  region net S1: 94.5,84 94.5,80 113.66,61 115.36,59 115.36,55.4 130.86,55.4 130.9,64.4 148.5,82 148.5,84
  region net 12V: 51.626,85.357 51.594,87.343 53.026,88.457 48.026,88.457 49.694,87.343 49.694,85.543 49.926,85.057 50.126,84.857 50.426,84.757 50.926,84.757 51.226,84.857 51.526,85.157
  region net 12V: 63.406,85.357 63.374,87.343 64.806,88.457 59.806,88.457 61.474,87.343 61.474,85.543 61.706,85.057 61.906,84.857 62.206,84.757 62.706,84.757 63.006,84.857 63.306,85.157
  region net 12V: 75.226,85.357 75.194,87.343 76.626,88.457 71.626,88.457 73.294,87.343 73.294,85.543 73.526,85.057 73.726,84.857 74.026,84.757 74.526,84.757 74.826,84.857 75.126,85.157
  region net 12V: 87.926,85.357 87.894,87.343 89.326,88.457 84.326,88.457 85.994,87.343 85.994,85.543 86.226,85.057 86.426,84.857 86.726,84.757 87.226,84.757 87.526,84.857 87.826,85.157
  region net 12V: 100.626,85.357 100.594,87.343 102.026,88.457 97.026,88.457 98.694,87.343 98.694,85.543 98.926,85.057 99.126,84.857 99.426,84.757 99.926,84.757 100.226,84.857 100.526,85.157
  region net 12V: 112.406,85.357 112.374,87.343 113.806,88.457 108.806,88.457 110.474,87.343 110.474,85.543 110.706,85.057 110.906,84.857 111.206,84.757 111.706,84.757 112.006,84.857 112.306,85.157
  region net 12V: 124.246,85.357 124.214,87.343 125.646,88.457 120.646,88.457 122.314,87.343 122.314,85.543 122.546,85.057 122.746,84.857 123.046,84.757 123.546,84.757 123.846,84.857 124.146,85.157
  region net 12V: 136.346,85.357 136.314,87.343 137.746,88.457 132.746,88.457 134.414,87.343 134.414,85.543 134.646,85.057 134.846,84.857 135.146,84.757 135.646,84.757 135.946,84.857 136.246,85.157
  region net 12V: 149.026,85.357 148.994,87.343 150.426,88.457 145.426,88.457 147.094,87.343 147.094,85.543 147.326,85.057 147.526,84.857 147.826,84.757 148.326,84.757 148.626,84.857 148.926,85.157
  region net 12V: 39.846,85.357 39.814,87.343 41.246,88.457 37.914,89.043 37.914,85.543 38.146,85.057 38.346,84.857 38.646,84.757 39.146,84.757 39.446,84.857 39.746,85.157
  region net S1: 144.594,86.643 144.594,85.043 143.194,83.543 148.194,83.543 146.494,85.043 146.294,86.943 146.094,87.143 145.794,87.243 145.294,87.243 144.994,87.143 144.694,86.843
  region net S1: 131.914,86.643 131.914,85.043 130.514,83.543 135.514,83.543 133.814,85.043 133.614,86.943 133.414,87.143 133.114,87.243 132.614,87.243 132.314,87.143 132.014,86.843
  region net S1: 119.814,86.643 119.814,85.043 118.414,83.543 123.414,83.543 121.714,85.043 121.514,86.943 121.314,87.143 121.014,87.243 120.514,87.243 120.214,87.143 119.914,86.843
  region net S1: 107.974,86.643 107.974,85.043 106.574,83.543 111.574,83.543 109.874,85.043 109.674,86.943 109.474,87.143 109.174,87.243 108.674,87.243 108.374,87.143 108.074,86.843
  region net S1: 96.194,86.643 96.194,85.043 94.794,83.543 99.794,83.543 98.094,85.043 97.894,86.943 97.694,87.143 97.394,87.243 96.894,87.243 96.594,87.143 96.294,86.843
  region net S2: 83.494,86.643 83.494,85.043 82.094,83.543 87.094,83.543 85.394,85.043 85.194,86.943 84.994,87.143 84.694,87.243 84.194,87.243 83.894,87.143 83.594,86.843
  region net S2: 70.794,86.643 70.794,85.043 69.394,83.543 74.394,83.543 72.694,85.043 72.494,86.943 72.294,87.143 71.994,87.243 71.494,87.243 71.194,87.143 70.894,86.843
  region net S2: 58.974,86.643 58.974,85.043 57.574,83.543 62.574,83.543 60.874,85.043 60.674,86.943 60.474,87.143 60.174,87.243 59.674,87.243 59.374,87.143 59.074,86.843
  region net S2: 47.194,86.643 47.194,85.043 45.794,83.543 50.794,83.543 49.094,85.043 48.894,86.943 48.694,87.143 48.394,87.243 47.894,87.243 47.594,87.143 47.294,86.843
  region net S2: 35.414,86.643 35.414,85.043 34.014,83.543 39.014,83.543 37.314,85.043 37.114,86.943 36.914,87.143 36.614,87.243 36.114,87.243 35.814,87.143 35.514,86.843
  region net GND: 111.24,54.1 112.74,52.6 111.24,52.6
  region net S1: 115.36,59 129.36,59 129.36,55.3 115.46,55.3 115.36,55.4
  region net GND: 142.36,58.6 133.96,58.6 133.96,54 115.36,54 113.86,55.6 113.86,59 100.86,59 100.86,51.2 100.8,41.7 114.5,33 142.36,33

## Silkscreen, mask and mechanical layers (free items; w line width, h text height)
Top Overlay:
  circle w0.254: c45.14,22.9 r12
  circle w0.254: c70.14,22.9 r12
  lines w0.1: 84.134,12.851 105.134,12.851 105.134,21.851 84.134,21.851 84.134,12.851
  lines w0.2: 43.5,48.793 cw(c45.207,48.793) 44,50 ccw(c42.31,51.69) 44.7,51.69 44.7,51.744 ccw(c43.117,51.744) 44.236,52.864 cw(c45.773,54.4) 43.6,54.4 cw(c44.566,54.4) 43.883,55.083 44,55.2 ; 0,0 0,100 175,100 175,0 0,0
  lines w0.254: 35.94,64.5 35.94,81.5 150.94,81.5 150.94,64.5 35.94,64.5
  text "Fan" at 165.6,61.8 h1.52 r90
Top Paste:
  lines w1.5: 65.34,45.2 78.44,45.2
Bottom Paste:
  lines w1.5: 5.64,67.4 9.94,67.4 25.34,52 ; 22.16,52 49.94,52 73.94,28 73.94,22.8 ; 27.24,47.7 39.84,47.7 42.94,44.6 42.94,34.3 35.16,26.52 35.16,7.6 ; 28.54,67.8 42.74,67.8 65.34,45.2 ; 40.16,7.6 42.06,9.5 51.54,9.5 ; 41.34,22.9 46.54,17.7 71.34,17.7 77.84,11.2 101.34,11.2 ; 42.14,45.4 48.64,45.4 ; 49.04,22.8 66.34,22.8 ; 65.46,45.2 78.44,45.2 ; 74.34,22.8 79.74,17.4 87.34,17.4 ; 91.34,6.1 105.94,6.1
  lines w2: 35.6,82.5 86.1,82.5 ; 41.8,82 66.4,57.4 86.9,57.4 ; 43.751,80.049 43.751,80.751 44.9,81.9 ; 62.3,82 86.9,57.4 ; 63.997,80.303 64.103,80.303 66.3,82.5 ; 84.5,82.5 84.8,82.5 ; 85.3,82.5 87.2,82.5 97.3,72.4 97.3,57.4 87.3,57.4 86.9,57.4 ; 95.5,82.5 147,82.5 ; 102.3,57.4 112.3,57.4 ; 106,82.5 117.3,71.2 117.3,57.4 127.3,57.4 127.3,71.2 127.4,71.2 138.7,82.5 ; 107.3,57.4 107.3,55.5 117.3,45.5 134.6,45.5 ; 119.4,82.4 122.3,79.5 ; 122.3,57.4 122.3,82.5 ; 122.3,79.6 122.4,79.6 125,82.2 ; 156,41.9 156,88.2 154.1,90.1 153.34,90.1 ; 153.34,90.1 39.522,90.1 153.34,90.1
Bottom Solder:
  lines w1.5: 5.64,67.4 9.94,67.4 25.34,52 25.44,52 ; 22.16,52 49.94,52 73.94,28 ; 27.24,47.7 39.84,47.7 42.94,44.6 42.94,34.3 35.16,26.52 35.16,7.6 ; 28.84,67.8 42.74,67.8 65.34,45.2 78.44,45.2 65.46,45.2 65.26,45.4 ; 40.16,7.6 42.06,9.5 51.54,9.5 ; 41.34,22.9 46.54,17.7 71.34,17.7 77.84,11.2 101.34,11.2 ; 42.04,45.5 42.14,45.4 48.64,45.4 ; 49.04,22.8 66.34,22.8 ; 73.94,22.7 73.94,27.9 ; 73.94,22.8 74.34,22.8 79.74,17.4 87.34,17.4 ; 91.34,6.1 105.94,6.1
  lines w2: 35.6,82.5 86.1,82.5 ; 39.522,90.1 153.34,90.1 154.1,90.1 156,88.2 156,41.9 ; 41.8,82 66.4,57.4 86.9,57.4 ; 43.751,80.049 43.751,80.751 44.9,81.9 ; 62.3,82 86.9,57.4 ; 63.997,80.303 64.103,80.303 66.3,82.5 ; 84.5,82.5 84.8,82.5 ; 85.3,82.5 87.2,82.5 97.3,72.4 97.3,57.4 87.3,57.4 86.9,57.4 ; 95.5,82.5 147,82.5 ; 102.3,57.4 112.3,57.4 ; 106,82.5 117.3,71.2 117.3,57.4 127.3,57.4 127.3,71.2 127.4,71.2 138.7,82.5 ; 107.3,57.4 107.3,55.5 117.3,45.5 134.6,45.5 ; 119.4,82.4 122.3,79.5 ; 122.3,57.4 122.3,82.5 ; 122.3,79.6 122.4,79.6 125,82.2